# Altium PCB pcb_take2-1.PcbDoc (part 2 of 2)
Units mm, origin at the board's own origin, x right, y up, seen from the top; angles counter-clockwise.
Board outline 120 x 150 mm, 8 copper layers (Top Layer, Power plane, Mid-Layer 1, Mid-Layer 2, Mid-Layer 3, MidLayer4, GND plane, Bottom Layer); 174 components, 191 nets, 1036 pads, 8 vias.
Unrouted connection lines stored in the file: 235.
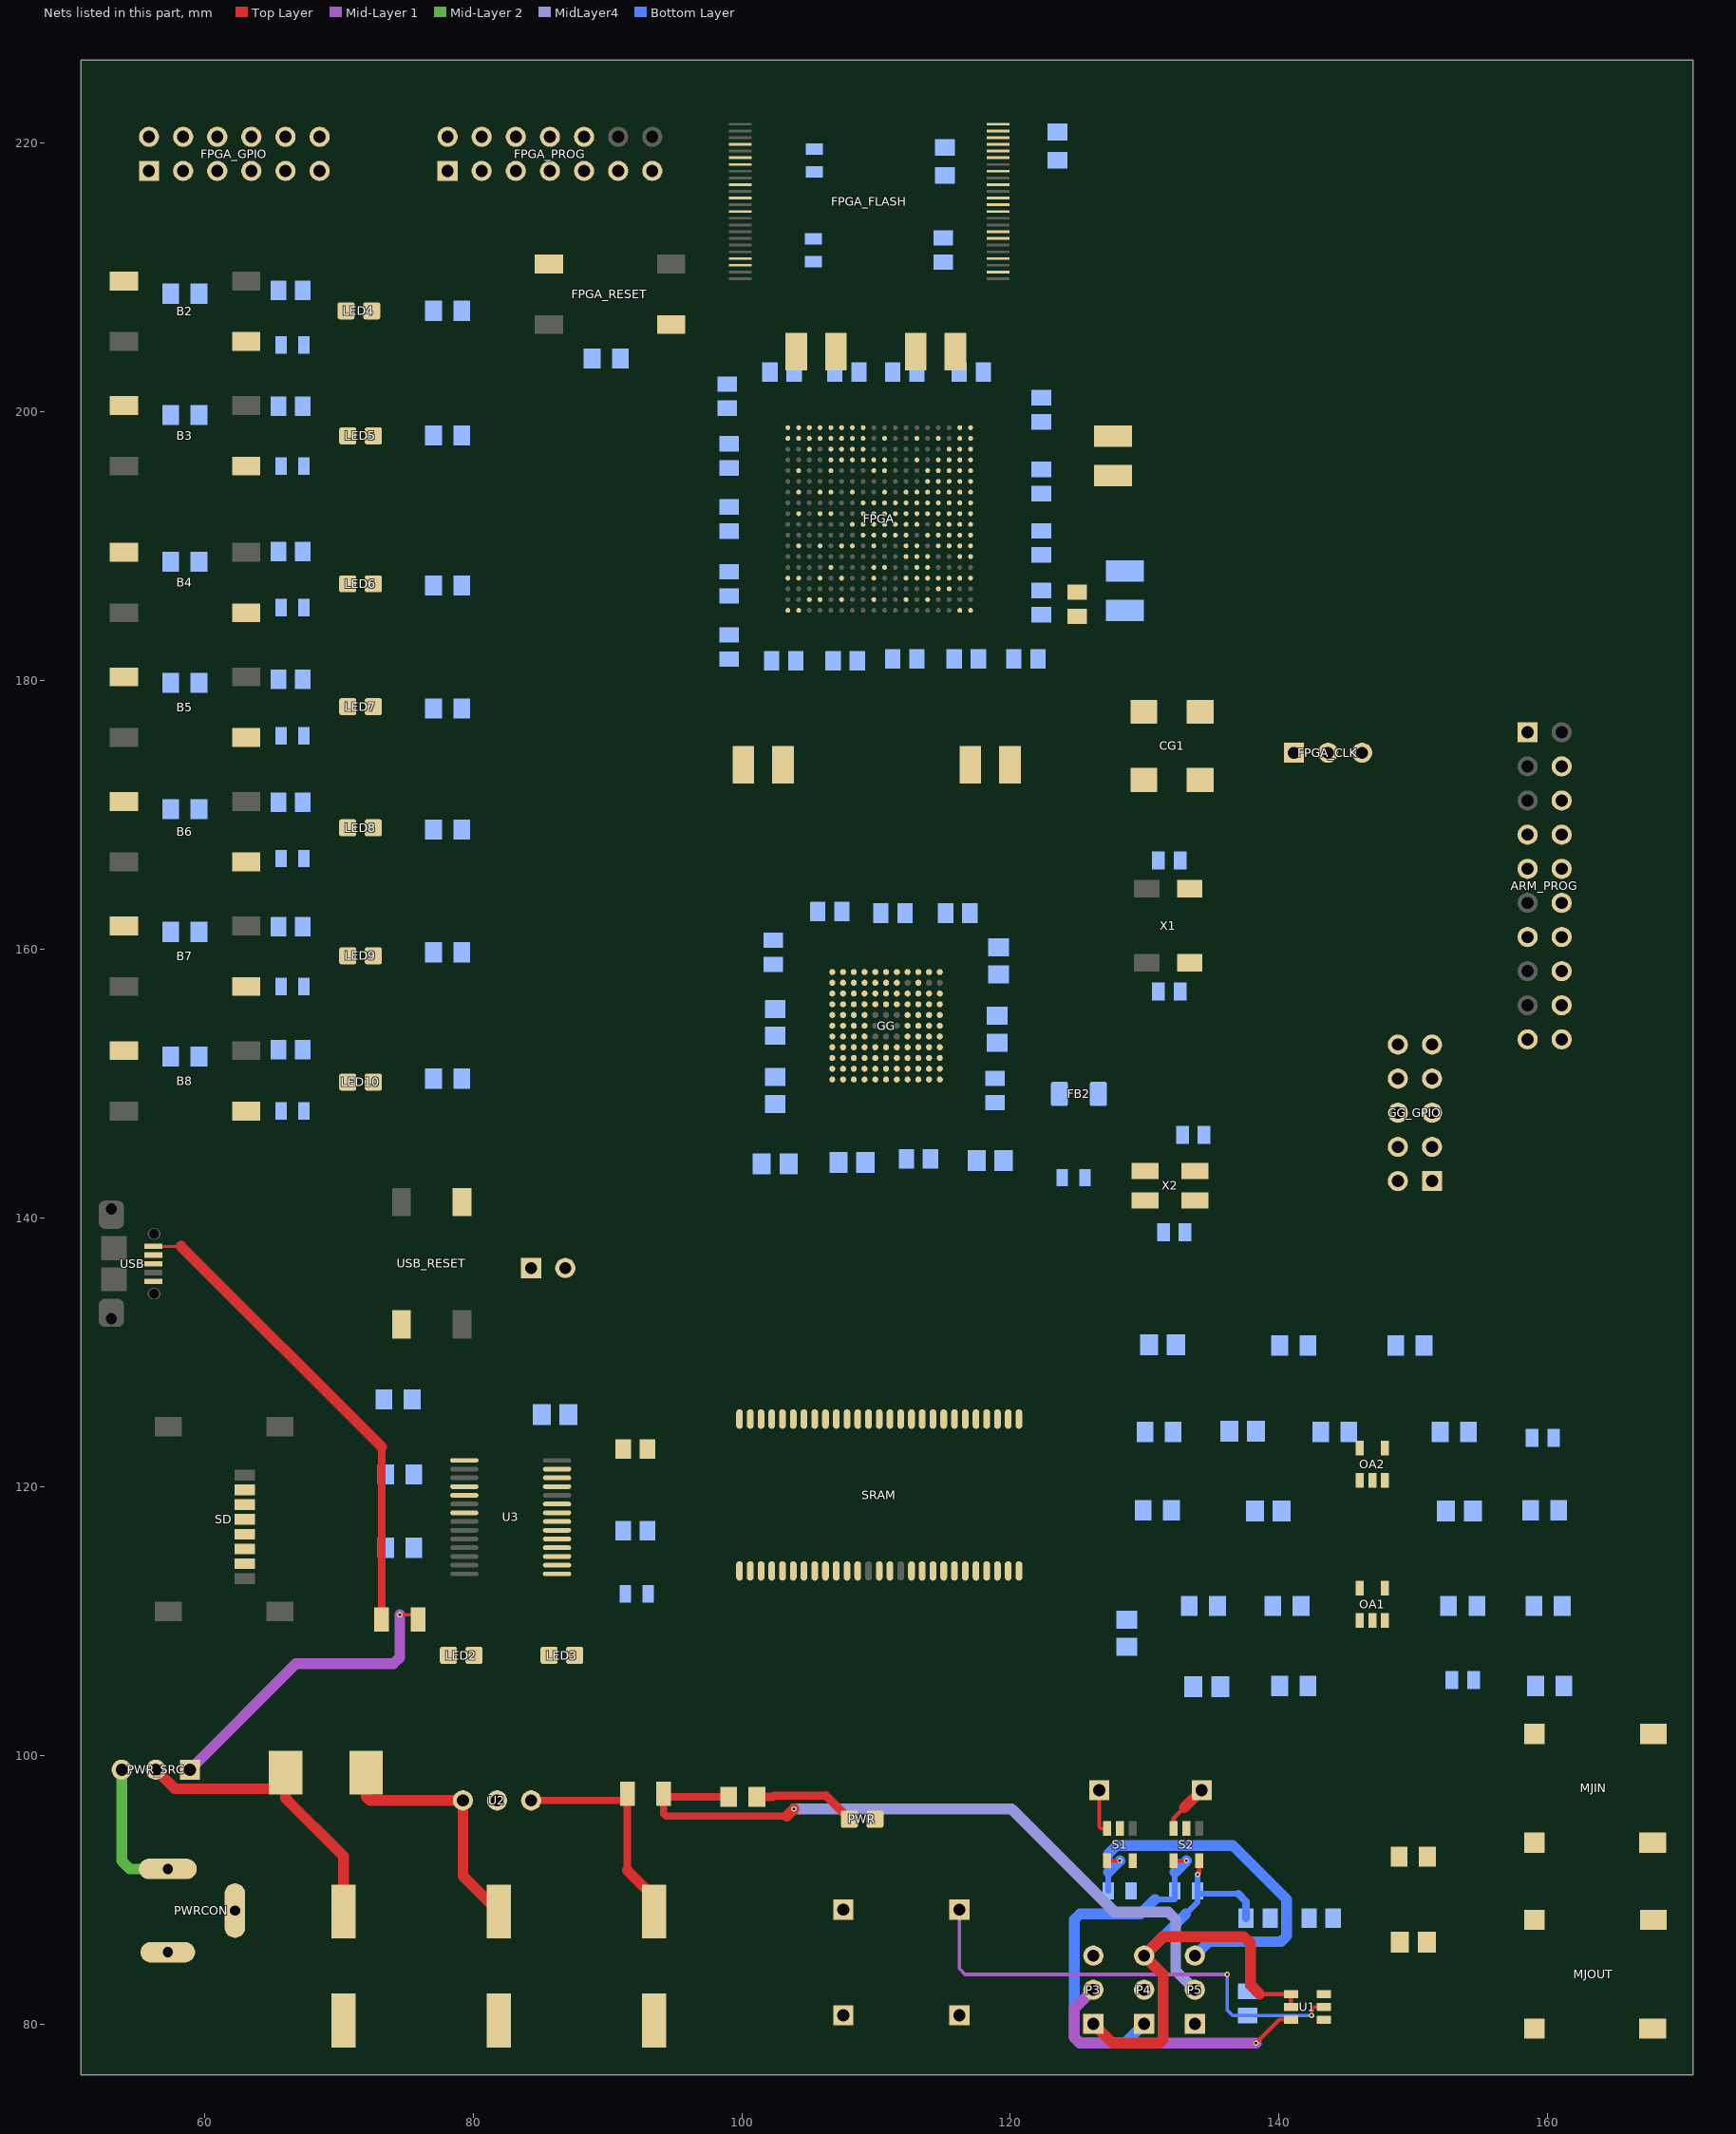
[diagram p7: the nets of this part, all layers, seen from the top]

## Part data
ARM_PROG: "Header, 10-Pin, Dual row"
C1 C43 C44 C45: library part CMP-1036-04747-1, "CAP 1uF 16V ±10% 0805 (2012 Metric) Thickness 1mm SMD"
C2 C6 C10 C14 C19 C23: library part CMP-1038-02303-1, "CAP 100uF 6.3V ±20% 1210 (3225 Metric) Thickness 2.8mm SMD"
C3 C7 C11 C15 C20 C24: library part CMP-1036-04881-1, "CAP 4.7uF 10V ±10% 0805 (2012 Metric) Thickness 1.45mm SMD"
C4 C5 C8 C9 C12 C13 C16 C17 C18 C21 C22 C25 C26: library part CMP-1036-04639-1, "CAP 470nF 16V ±10% 0805 (2012 Metric) Thickness 1mm SMD"
C27 C31: library part CMP-1036-04932-1, "CAP 10uF 25V ±10% 0805 (2012 Metric) Thickness 1.45mm SMD"
C28 C29 C30 C49 C51 C52 C53 C54 C55 C56 C57 C58 C68: library part CMP-1036-03842-1, "CAP 10nF 50V ±10% 0805 (2012 Metric) Thickness 0.75mm SMD"
C32 C33 C34 C35 C36 C37 C38 C50: library part CMP-1036-04420-1, "CAP 100nF 50V ±10% 0805 (2012 Metric) Thickness 1mm SMD"
C39 C40: library part CMP-1036-01219-1, "CAP 22pF 16V ±5% 0805 (2012 Metric) Thickness 0.75mm SMD"
C41 C42: library part CMP-1036-01407-1, "CAP 33pF 16V ±5% 0805 (2012 Metric) Thickness 0.75mm SMD"
C46 C47 C48: "Polarized Capacitor (Axial)"
C59 C64: library part CMP-1036-02142-1, "CAP 150pF 100V ±1% 0805 (2012 Metric) Thickness 0.75mm SMD"
C60 C65: library part CMP-1036-04915-1, "CAP 10uF 6.3V ±10% 0805 (2012 Metric) Thickness 1.45mm SMD"
C61 C67: library part CMP-1036-02797-1, "CAP 680pF 6.3V ±5% 0805 (2012 Metric) Thickness 1mm SMD"
C62 C66: library part CMP-1036-03801-1, "CAP 10nF 6.3V ±5% 0805 (2012 Metric) Thickness 1mm SMD"
C63: library part CMP-1036-04390-1, "CAP 100nF 6.3V ±5% 0805 (2012 Metric) Thickness 1mm SMD"
FB2: library part Inductor, "Inductor"
FPGA: "Spartan-6 LX 1.2V FPGA, 218 User I/Os, 324-Ball Chip-Scale BGA (0.8mm Pitch), Speed Grade 2, Industrial Grade, Pb-Free"
FPGA_CLK P3 P4 P5 PWR_SRC: "Header, 3-Pin"
FPGA_GPIO: "Header, 6-Pin, Dual row"
FPGA_PROG: "Header, 7-Pin, Dual row"
GG: "EFM32 Giant Gecko, M3 ARM Cortex CPU, 1024 KB Flash, 128 KB RAM, 1.85 - 3.8 V Supply, 48 MHz Max Speed, -40 to 85 degC, 112-Pin BGA, RoHS Compliant"
GG_GPIO: "Header, 5-Pin, Dual row"
LED2 LED3: library part LED_SMD_Red_0805, "LED, 0805 SMD, Red"
LED4 LED5 LED6 LED7 LED8 LED9 LED10 PWR: library part LED_SMD_Green_0805, "LED, 0805 SMD, Green"
P_UART: "Header, 2-Pin"
R1: library part CMP-1013-00002-1, "1R 0.125W 5% 0805 (2012 Metric)  SMD"
R2 R4: library part CMP-1013-00026-1, "10R 0.125W 5% 0805 (2012 Metric)  SMD"
R3 R5 R6 R12 R13 R25 R26 R27 R28 R29 R45: library part CMP-1013-00454-1, "330R 0.125W 1% 0805 (2012 Metric)  SMD"
R7 R9 R10 R15 R16 R17 R18 R19 R46 R47: library part CMP-1013-00122-1, "100K 0.125W 5% 0805 (2012 Metric)  SMD"
R8 R11 R14 R20 R21 R22 R23 R24 R48: library part CMP-1013-00050-1, "100R 0.125W 5% 0805 (2012 Metric)  SMD"
R30 R33 R38 R41: library part CMP-1013-00641-1, "15K 0.125W 1% 0805 (2012 Metric)  SMD"
R31 R32 R39 R40: library part CMP-1013-00510-1, "1K 0.125W 1% 0805 (2012 Metric)  SMD"
R34 R42: library part CMP-1013-00670-1, "27K 0.125W 1% 0805 (2012 Metric)  SMD"
R35 R43: library part CMP-1013-00659-1, "22K 0.125W 1% 0805 (2012 Metric)  SMD"
R36 R37: library part CMP-1013-00699-1, "47K 0.125W 1% 0805 (2012 Metric)  SMD"
R44: library part CMP-1013-00586-1, "4K7 0.125W 1% 0805 (2012 Metric)  SMD"
U3: "USB UART Asynchronous Serial Data Transfer Chip, SSOP-28, Tape and Reel"
X1: library part MC-306

## Via types
v1: diameter 0.4, hole 0.2, Top Layer to Bottom Layer, 8 vias

## Nets (pads, with @x,y where several pads share a name; then routed paths per layer and width w, separated by ;. In a path a pad name is that pad's centre, name@x,y a point inside that pad or via, vN(x,y) a via of type N, cw(c..) or ccw(c..) an arc to the next point about the centre after c; other vN are vias at no path point)
ARM_HFXTAL_N: C42.1 GG.L9 X2.3
ARM_HFXTAL_P: C41.1 GG.L8 X2.1
ARM_LFXTAL_N: C40.2 GG.L1 X1.1
ARM_LFXTAL_P: C39.2 GG.K1 X1.2
CTRL_BUS0: FPGA.B8 GG.A8
CTRL_BUS1: FPGA.A8 GG.H1
CTRL_BUS2: FPGA.D9
EBI_A0: FPGA.F15 GG.J4 SRAM.11
EBI_A1: FPGA.F16 GG.K3 SRAM.10
EBI_A2: FPGA.C17 GG.L3 SRAM.9
EBI_A3: FPGA.C18 GG.J7 SRAM.8
EBI_A4: FPGA.F14 GG.J8 SRAM.7
EBI_A5: FPGA.G14 GG.G10 SRAM.48
EBI_A6: FPGA.D17 GG.G11 SRAM.47
EBI_A7: FPGA.D18 GG.E9 SRAM.46
EBI_A8: FPGA.H12 GG.E10 SRAM.45
EBI_A9: FPGA.G13 GG.D11 SRAM.44
EBI_A10: FPGA.E16 GG.C10 SRAM.38
EBI_A11: FPGA.E18 GG.A9 SRAM.37
EBI_A12: FPGA.K12 GG.B9 SRAM.36
EBI_A13: FPGA.K13 GG.C9 SRAM.35
EBI_A14: FPGA.F17 GG.D9 SRAM.34
EBI_A15: FPGA.F18 GG.D10 SRAM.21
EBI_A16: FPGA.H13 GG.E4 SRAM.20
EBI_A17: FPGA.H14 GG.F1 SRAM.19
EBI_A18: FPGA.H15 GG.F2 SRAM.18
EBI_A19: FPGA.H16 GG.F3 SRAM.17
EBI_A20: FPGA.G16 GG.F4
EBI_A21: FPGA.G18 GG.G1
EBI_A22: FPGA.J13 GG.G2
EBI_AD0: GG.B4 SRAM.22
EBI_AD1: GG.A4 SRAM.24
EBI_AD2: GG.C3 SRAM.25
EBI_AD3: GG.B3 SRAM.27
EBI_AD4: GG.A3 SRAM.28
EBI_AD5: GG.B2 SRAM.30
EBI_AD6: GG.A2 SRAM.31
EBI_AD7: GG.A1 SRAM.33
EBI_AD8: GG.B1 SRAM.49
EBI_AD9: GG.C2 SRAM.51
EBI_AD10: GG.C1 SRAM.52
EBI_AD11: GG.D2 SRAM.54
EBI_AD12: GG.D1 SRAM.1
EBI_AD13: GG.E3 SRAM.3
EBI_AD14: GG.E2 SRAM.4
EBI_AD15: GG.E1 SRAM.6
EBI_CS0: FPGA.M13 GG.D6
EBI_CS1: GG.A5 SRAM.16
EBI_D0: FPGA.N18
EBI_D1: FPGA.N17
EBI_D2: FPGA.M18
EBI_D3: FPGA.M16
EBI_D4: FPGA.L18
EBI_D5: FPGA.L17
EBI_D6: FPGA.K18
EBI_D7: FPGA.K17
EBI_D8: FPGA.J18
EBI_D9: FPGA.J16
EBI_D10: FPGA.H18
EBI_D11: FPGA.H17
EBI_D12: FPGA.L16
EBI_D13: FPGA.L15
EBI_D14: FPGA.K16
EBI_D15: FPGA.K15
EBI_REN: FPGA.N14 GG.C6 SRAM.42
EBI_WEN: FPGA.L14 GG.B6 SRAM.15
FPGA_IO2: GG.J1
GND: ARM_PROG.4 ARM_PROG.6 ARM_PROG.8 ARM_PROG.10 ARM_PROG.12 ARM_PROG.14 ARM_PROG.16 ARM_PROG.18 ARM_PROG.20 C1.2 C2.1 C3.1 C4.1 C5.1 C6.1 C7.1 C8.1 C9.1 C10.1 C11.1 C12.1 C13.1 C14.1 C15.1 C16.1 C17.1 C18.1 C19.1 C20.1 C21.1 C22.1 C23.1 C24.1 C25.1 C26.1 C27.1 C28.1 C29.1 C30.1 C31.1 C32.1 C33.1 C34.1 C35.1 C36.1 C37.1 C38.1 C39.1 C40.1 C41.2 C42.2 C43.2 C44.1 C45.2 C46.2 C47.2 C48.2 C49.1 C50.2 C51.1 C52.1 C53.1 C54.1 C55.1 C56.1 C57.1 C58.1 C61.2 C62.2 C63.2 C66.2 C67.2 C68.1 CG1.2 FPGA.A1 FPGA.A18 FPGA.B7 FPGA.B13 FPGA.C3 FPGA.C16 FPGA.D5 FPGA.D10 FPGA.E15 FPGA.G2 FPGA.G5 FPGA.G12 FPGA.G17 FPGA.H8 FPGA.H10 FPGA.J4 FPGA.J9 FPGA.J11 FPGA.J15 FPGA.K8 FPGA.K10 FPGA.L9 FPGA.L11 FPGA.M2 FPGA.M6 FPGA.M17 FPGA.N12 FPGA.N13 FPGA.R1 FPGA.R4 FPGA.R9 FPGA.R14 FPGA.R16 FPGA.R18 FPGA.T16 FPGA.U6 FPGA.U12 FPGA.V1 FPGA.V18 FPGA_CLK.1 FPGA_FLASH.2 FPGA_FLASH.7 FPGA_FLASH.17 FPGA_FLASH.23 FPGA_FLASH.31 FPGA_FLASH.36 FPGA_FLASH.46 FPGA_PROG.1 FPGA_PROG.3 FPGA_PROG.5 FPGA_PROG.7 FPGA_PROG.9 FPGA_PROG.11 FPGA_PROG.13 GG.C7 GG.D4 GG.F9 GG.G3 GG.G9 GG.H6 GG.K4 GG.K7 GG.K10 GG.L7 GND.1 LED4.K LED5.K LED6.K LED7.K LED8.K LED9.K LED10.K MJIN.3 MJOUT.3 OA1.2 OA2.2 P3.3 PWR.K PWRCON.2 PWRCON.3 R8.2 R11.2 R14.2 R20.2 R21.2 R22.2 R23.2 R24.2 R31.1 R37.2 R39.1 R48.2 S1.2 S2.2 SD.6 SRAM.5 SRAM.12 SRAM.26 SRAM.32 SRAM.39 SRAM.41 SRAM.53 U1.6 U2.2 U3.7 U3.18 U3.21 U3.25 U3.26 U3.27 USB.5 X2.2 X2.4
GPIO0: GG.H4 R25.2
GPIO1: GG.H5 R26.2
GPIO2: GG.J5 R27.2
GPIO3: GG.J6 R28.2
GPIO4: GG.K5 R29.2
GPIO5: B4.1 C54.2 GG.D3 R15.1
GPIO6: B5.1 C55.2 GG.C11 R16.1
GPIO7: B6.1 C56.2 GG.L11 R17.1
GPIO8: B7.1 C57.2 GG.K11 R18.1
GPIO9: B8.1 C58.2 GG.J9 R19.1
GPIO10: GG.J10 GG_GPIO.1
GPIO11: GG.H8 GG_GPIO.2
GPIO12: GG.B5 GG_GPIO.3
GPIO13: GG.C5 GG_GPIO.4
GPIO14: GG.C4 GG_GPIO.5
GPIO15: GG.H3 GG_GPIO.6
GPIO16: GG.J3 GG_GPIO.7
GPIO17: GG.F10 GG_GPIO.8
GPIO18: GG.E11 GG_GPIO.9
GPIO19: GG.A7 GG_GPIO.10
GPIO20: GG.A10
GPIO21: GG.A11
GPIO_FPGA0: FPGA.B2 R12.2
GPIO_FPGA1: FPGA.A2 R13.2
GPIO_FPGA2: B2.1 C52.2 FPGA.D6 R9.1
GPIO_FPGA3: B3.1 C53.2 FPGA.C6 R10.1
GPIO_FPGA4: FPGA.B3 FPGA_GPIO.1
GPIO_FPGA5: FPGA.A3 FPGA_GPIO.2
GPIO_FPGA6: FPGA.B4 FPGA_GPIO.3
GPIO_FPGA7: FPGA.A4 FPGA_GPIO.4
GPIO_FPGA8: FPGA.C5 FPGA_GPIO.5
GPIO_FPGA9: FPGA.A5 FPGA_GPIO.6
GPIO_FPGA10: FPGA.B6 FPGA_GPIO.7
GPIO_FPGA11: FPGA.A6 FPGA_GPIO.8
GPIO_FPGA12: FPGA.C7 FPGA_GPIO.9
GPIO_FPGA13: FPGA.A7 FPGA_GPIO.10
GPIO_FPGA14: FPGA.D8 FPGA_GPIO.11
GPIO_FPGA15: FPGA.C8 FPGA_GPIO.12
NetARM_PROG_19: ARM_PROG.19 GG.K6
NetB2_3: B2.3 R11.1
NetB3_3: B3.3 R14.1
NetB4_3: B4.3 R20.1
NetB5_3: B5.3 R21.1
NetB6_3: B6.3 R22.1
NetB7_3: B7.3 R23.1
NetB8_3: B8.3 R24.1
NetC1_1: C1.1 GG.F11
NetC45_1: C45.1 P3.1 P4.3 R2.1 S2.5 U1.1 U1.2 | length 42.6
  Top Layer w0.3: v1(133.946,91.135) 134.046,91.235 S2.5@134.046,92.145 ; 138.547,82.23 U1.1@140.868,82.23 ; U1.2@140.888,81.28 140.868,81.28 U1.1@140.868,82.23 ; U1.1@140.888,82.23 U1.1@140.868,82.23
  Top Layer w0.8: P3.1@126.174,80.01 127.622,78.562 131.089,78.562 131.369,78.842 131.369,83.674 P4.3@129.953,85.09 131.375,86.512 137.363,86.512 137.871,86.004 137.871,82.906 138.547,82.23
  Bottom Layer w0.425: 133.052,88.189 133.946,89.083 R2.1@133.946,89.687 ; v1(133.946,91.135) R2.1@133.946,89.916 R2.1@133.946,89.687 ; 136.957,89.687 R2.1@133.946,89.687
  Bottom Layer w0.575: 136.957,89.687 137.53,89.114 C45.1@137.53,87.884
  Bottom Layer w0.8: P4.3@129.953,85.09 133.052,88.189
NetC46_1: C46.1 L1.1 PWR_SRC.2 | length 22.4
  Top Layer w0.8: PWR_SRC.2@56.388,98.933 57.81,97.511 L1.1@66.04,97.511 ; L1.1@66.04,98.707 L1.1@66.04,97.511 ; C46.1@70.358,88.364 70.358,92.481 66.04,96.799 L1.1@66.04,97.511
NetC47_1: C47.1 L1.2 U2.1 | length 18.5
  Top Layer w0.8: L1.2@72.04,98.707 72.04,96.926 72.319,96.647 U2.1@79.248,96.647 79.248,91.031 C47.1@81.915,88.364
NetC48_1: C48.1 FB1.1 U2.3 | length 16.7
  Top Layer w0.55: U2.3@84.328,96.647 FB1.1@91.487,96.647 ; 91.487,91.444 FB1.1@91.487,96.647 ; FB1.1@91.487,97.126 FB1.1@91.487,96.647
  Top Layer w0.8: 91.487,91.444 93.472,89.459 C48.1@93.472,88.364
NetC50_1: C50.1 U3.17
NetC51_2: C51.2 R7.1 U3.19 USB_RESET.1
NetC59_1: C59.1 OA1.1 R30.1 R35.2
NetC59_2: C59.2 OA1.5 R34.1
NetC60_1: C60.1 R33.2
NetC60_2: C60.2 R31.2 R32.1
NetC61_1: C61.1 R30.2 R33.1 R34.2
NetC62_1: C62.1 GG.H10 R35.1
NetC63_1: C63.1 OA1.3 OA2.3 R36.1 R37.1
NetC64_1: C64.1 OA2.1 R38.1 R43.2
NetC64_2: C64.2 OA2.5 R42.1
NetC65_1: C65.1 R41.2
NetC65_2: C65.2 R39.2 R40.1
NetC66_1: C66.1 GG.H11 R43.1
NetC67_1: C67.1 R38.2 R41.1 R42.2
NetC68_2: C68.2 FPGA.V2 FPGA_RESET.1 R47.1
NetCG1_1: CG1.1 FPGA_CLK.2
NetCG1_3: CG1.3 FPGA.L12
NetFB1_2: FB1.2 P5.2 R3.2 | length 54
  Top Layer w0.55: FB1.2@94.187,97.126 FB1.2@94.187,96.901 ; R3.2@99.026,96.901 FB1.2@94.187,96.901 ; 103.353,95.479 94.365,95.479 94.187,95.656 FB1.2@94.187,96.901
  Top Layer w0.8: 103.353,95.479 v1(103.886,96.012)
  MidLayer4 w0.8: v1(103.886,96.012) 120.091,96.012 127.762,88.341 131.75,88.341 132.309,87.782 132.309,83.972 P5.2@133.731,82.55
NetFB2_1: FB2.1 GG.K8 GG.K9 GG.L10
NetFB2_2: FB2.2 R1.1
NetFB3_1: FB3.1 USB.1 | length 36
  Top Layer w0.2: USB.1@56.211,137.886 58.268,137.886
  Top Layer w0.55: FB3.1@73.199,110.109 73.199,122.955
  Top Layer w0.8: 58.268,137.886 73.199,122.955
NetFPGA_A17: FPGA.A17 FPGA_FLASH.20 FPGA_PROG.6
NetFPGA_B18: FPGA.B18 FPGA_FLASH.21 FPGA_PROG.4
NetFPGA_D15: FPGA.D15 FPGA_PROG.10
NetFPGA_D16: FPGA.D16 FPGA_FLASH.19
NetFPGA_FLASH_22: FPGA_FLASH.22 FPGA_PROG.8
NetFPGA_P13: FPGA.P13 R46.1
NetFPGA_R13: FPGA.R13 FPGA_FLASH.28
NetFPGA_R15: FPGA.R15 FPGA_FLASH.12
NetFPGA_RESET_3: FPGA_RESET.3 R48.1
NetFPGA_U3: FPGA.U3 FPGA_FLASH.11 R44.2
NetFPGA_V17: FPGA.V17 FPGA_FLASH.13 R45.2
NetGG_A6: GG.A6 P_UART.1 U3.1
NetGG_B7: GG.B7 P_UART.2 U3.5
NetGG_H9: GG.H9 S2.3 SNS12.1 | length 3.7
  Top Layer w0.3: S2.3@132.146,94.545 132.146,95.316 132.944,96.114
  Top Layer w0.8: 132.944,96.114 SNS12.1@134.239,97.409
NetGG_J11: GG.J11 S1.3 SNS33.1 | length 3.4
  Top Layer w0.3: SNS33.1@126.619,97.409 126.619,94.691 126.771,94.539 127.193,94.539 S1.3@127.193,94.545
NetGG_L5: GG.L5 MJOUT.2
NetGG_L6: GG.L6 MJOUT.1
NetLED2_K: LED2.K R5.1
NetLED3_K: LED3.K R6.1
NetLED4_A: LED4.A R12.1
NetLED5_A: LED5.A R13.1
NetLED6_A: LED6.A R25.1
NetLED7_A: LED7.A R26.1
NetLED8_A: LED8.A R27.1
NetLED9_A: LED9.A R28.1
NetLED10_A: LED10.A R29.1
NetMJIN_1: MJIN.1 R40.2
NetMJIN_2: MJIN.2 R32.2
NetP3_2: P3.2 U1.3 | length 21.2
  Top Layer w0.3: v1(138.288,78.588) 140.03,80.33 U1.3@140.888,80.33
  Mid-Layer 1 w0.8: P3.2@126.174,82.55 124.765,81.14 124.765,78.994 125.171,78.588 v1(138.288,78.588)
NetP4_1: P4.1 R2.2 S2.4 | length 27
  Top Layer w0.3: S2.4@132.146,92.145 132.146,92.151 v1(133.096,92.151)
  Bottom Layer w0.425: 130.759,89.281 132.246,89.281 R2.2@132.246,89.916 132.246,91.301
  Bottom Layer w0.8: P4.1@129.953,80.01 128.53,78.588 125.171,78.588 124.765,78.994 124.765,87.782 125.171,88.189 129.667,88.189 130.759,89.281 ; 132.246,91.301 v1(133.096,92.151)
NetP5_3: P5.3 R4.1 S1.4 | length 30.3
  Top Layer w0.3: S1.4@127.193,92.145 127.193,92.151 v1(128.143,92.151)
  Bottom Layer w0.425: R4.1@127.293,89.916 127.293,91.301 127.293,92.659
  Bottom Layer w0.8: 127.293,91.301 v1(128.143,92.151) ; 127.293,92.659 127.928,93.294 136.55,93.294 140.564,89.281 140.564,86.563 140.132,86.131 134.772,86.131 P5.3@133.731,85.09
NetPWR_A: PWR.A R3.1 | length 7.7
  Top Layer w0.625: R3.1@101.126,96.901 102.286,96.901 102.387,97.003 106.261,97.003
  Top Layer w0.635: 106.261,97.003 PWR.A@108.013,95.25
NetPWR_SRC_3: PWR_SRC.3 PWRCON.1 | length 10.5
  Mid-Layer 2 w0.8: PWR_SRC.3@53.848,98.933 53.848,92.154 54.458,91.544 PWRCON.1@57.277,91.544
NetR5_2: R5.2 U3.22
NetR6_2: R6.2 U3.23
NetR8_1: R8.1 USB_RESET.3
NetU3_15: U3.15 USB.3
NetU3_16: U3.16 USB.2
SWCLK: ARM_PROG.9 GG.E8
SWDIO: ARM_PROG.7 GG.D8
SWO: ARM_PROG.13 GG.C8
US2_CLK: GG.K2 SD.5
US2_CS: GG.L2 SD.2
US2_RX: GG.J2 SD.7
US2_TX: GG.H2 SD.3
VCC12: C43.1 FPGA.G7 FPGA.H9 FPGA.H11 FPGA.J8 FPGA.J10 FPGA.K9 FPGA.K11 FPGA.L8 FPGA.L10 FPGA.M7 FPGA.M12 PWR12.1 U1.4
VCC18: C44.2 FPGA_FLASH.4 FPGA_FLASH.15 FPGA_FLASH.34 PWR18.1 U1.5 | length 35
  Top Layer w0.254: v1(142.418,80.645) 142.418,81.077 142.621,81.28 U1.5@143.338,81.28
  Mid-Layer 1 w0.254: PWR18.1@116.205,88.519 116.205,84.125 116.637,83.693 v1(136.144,83.693)
  Bottom Layer w0.254: v1(136.144,83.693) 136.144,81.04 136.55,80.634 C44.2@137.668,80.634 142.407,80.634 v1(142.418,80.645)
VCC33: ARM_PROG.1 C2.2 C3.2 C4.2 C5.2 C6.2 C7.2 C8.2 C9.2 C10.2 C11.2 C12.2 C13.2 C14.2 C15.2 C16.2 C17.2 C18.2 C19.2 C20.2 C21.2 C22.2 C23.2 C24.2 C25.2 C26.2 C27.2 C28.2 C29.2 C30.2 C31.2 C32.2 C33.2 C34.2 C35.2 C36.2 C37.2 C38.2 CG1.4 FPGA.B1 FPGA.B5 FPGA.B10 FPGA.B15 FPGA.B17 FPGA.D7 FPGA.D13 FPGA.E2 FPGA.E5 FPGA.E9 FPGA.E10 FPGA.E14 FPGA.E17 FPGA.G4 FPGA.G10 FPGA.G15 FPGA.J2 FPGA.J5 FPGA.J12 FPGA.J14 FPGA.J17 FPGA.K7 FPGA.M4 FPGA.M9 FPGA.M15 FPGA.P5 FPGA.P9 FPGA.P10 FPGA.P14 FPGA.R2 FPGA.R6 FPGA.R12 FPGA.R17 FPGA.T15 FPGA.U4 FPGA.U9 FPGA.U14 FPGA_CLK.3 FPGA_FLASH.8 FPGA_FLASH.24 FPGA_FLASH.30 FPGA_FLASH.38 FPGA_FLASH.45 GG.D5 GG.D7 GG.F8 GG.G4 GG.G8 GG.H7 GG.L4 LED2.A LED3.A OA1.4 OA2.4 P4.2 P5.1 PWR33.1 R1.2 R4.2 R7.2 R9.2 R10.2 R15.2 R16.2 R17.2 R18.2 R19.2 R36.2 R44.1 R45.1 R46.2 R47.2 S1.5 SD.4 SRAM.2 SRAM.13 SRAM.14 SRAM.23 SRAM.29 SRAM.50 U3.4
VCC33V: FPGA_PROG.2
VCC_USB_SUPPLY: C49.2 FB3.2 PWR_SRC.1 U3.20 | length 23.6
  Top Layer w0.254: v1(74.549,110.465) FB3.2@75.899,110.465
  Mid-Layer 1 w0.8: PWR_SRC.1@58.928,98.933 66.827,106.832 74.092,106.832 74.549,107.29 v1(74.549,110.465)
pads on no net: ARM_PROG.2 ARM_PROG.3 ARM_PROG.5 ARM_PROG.11 ARM_PROG.15 ARM_PROG.17 B2.2 B2.4 B3.2 B3.4 B4.2 B4.4 B5.2 B5.4 B6.2 B6.4 B7.2 B7.4 B8.2 B8.4 FB2.0 FPGA.A9 FPGA.A10 FPGA.A11 FPGA.A12 FPGA.A13 FPGA.A14 FPGA.A15 FPGA.A16 FPGA.B9 FPGA.B11 FPGA.B12 FPGA.B14 FPGA.B16 FPGA.C1 FPGA.C2 FPGA.C4 FPGA.C9 FPGA.C10 FPGA.C11 FPGA.C12 FPGA.C13 FPGA.C14 FPGA.C15 FPGA.D1 FPGA.D2 FPGA.D3 FPGA.D4 FPGA.D11 FPGA.D12 FPGA.D14 FPGA.E1 FPGA.E3 FPGA.E4 FPGA.E6 FPGA.E7 FPGA.E8 FPGA.E11 FPGA.E12 FPGA.E13 FPGA.F1 FPGA.F2 FPGA.F3 FPGA.F4 FPGA.F5 FPGA.F6 FPGA.F7 FPGA.F8 FPGA.F9 FPGA.F10 FPGA.F11 FPGA.F12 FPGA.F13 FPGA.G1 FPGA.G3 FPGA.G6 FPGA.G8 FPGA.G9 FPGA.G11 FPGA.H1 FPGA.H2 FPGA.H3 FPGA.H4 FPGA.H5 FPGA.H6 FPGA.H7 FPGA.J1 FPGA.J3 FPGA.J6 FPGA.J7 FPGA.K1 FPGA.K2 FPGA.K3 FPGA.K4 FPGA.K5 FPGA.K6 FPGA.K14 FPGA.L1 FPGA.L2 FPGA.L3 FPGA.L4 FPGA.L5 FPGA.L6 FPGA.L7 FPGA.L13 FPGA.M1 FPGA.M3 FPGA.M5 FPGA.M8 FPGA.M10 FPGA.M11 FPGA.M14 FPGA.N1 FPGA.N2 FPGA.N3 FPGA.N4 FPGA.N5 FPGA.N6 FPGA.N7 FPGA.N8 FPGA.N9 FPGA.N10 FPGA.N11 FPGA.N15 FPGA.N16 FPGA.P1 FPGA.P2 FPGA.P3 FPGA.P4 FPGA.P6 FPGA.P7 FPGA.P8 FPGA.P11 FPGA.P12 FPGA.P15 FPGA.P16 FPGA.P17 FPGA.P18 FPGA.R3 FPGA.R5 FPGA.R7 FPGA.R8 FPGA.R10 FPGA.R11 FPGA.T1 FPGA.T2 FPGA.T3 FPGA.T4 FPGA.T5 FPGA.T6 FPGA.T7 FPGA.T8 FPGA.T9 FPGA.T10 FPGA.T11 FPGA.T12 FPGA.T13 FPGA.T14 FPGA.T17 FPGA.T18 FPGA.U1 FPGA.U2 FPGA.U5 FPGA.U7 FPGA.U8 FPGA.U10 FPGA.U11 FPGA.U13 FPGA.U15 FPGA.U16 FPGA.U17 FPGA.U18 FPGA.V3 FPGA.V4 FPGA.V5 FPGA.V6 FPGA.V7 FPGA.V8 FPGA.V9 FPGA.V10 FPGA.V11 FPGA.V12 FPGA.V13 FPGA.V14 FPGA.V15 FPGA.V16 FPGA_FLASH.1 FPGA_FLASH.3 FPGA_FLASH.5 FPGA_FLASH.6 FPGA_FLASH.9 FPGA_FLASH.10 FPGA_FLASH.14 FPGA_FLASH.16 FPGA_FLASH.18 FPGA_FLASH.25 FPGA_FLASH.26 FPGA_FLASH.27 FPGA_FLASH.29 FPGA_FLASH.32 FPGA_FLASH.33 FPGA_FLASH.35 FPGA_FLASH.37 FPGA_FLASH.39 FPGA_FLASH.40 FPGA_FLASH.41 FPGA_FLASH.42 FPGA_FLASH.43 FPGA_FLASH.44 FPGA_FLASH.47 FPGA_FLASH.48 FPGA_PROG.12 FPGA_PROG.14 FPGA_RESET.2 FPGA_RESET.4 GG.B8 GG.B10 GG.B11 GG.E5 GG.E6 GG.E7 GG.F5 GG.F6 GG.F7 GG.G5 GG.G6 GG.G7 LED2.0 LED3.0 LED4.0 LED5.0 LED6.0 LED7.0 LED8.0 LED9.0 LED10.0 PWR.0 S1.1 S2.1 SD. SD.1 SD.8 SRAM.40 SRAM.43 U3.2 U3.3 U3.6 U3.8 U3.9 U3.10 U3.11 U3.12 U3.13 U3.14 U3.24 U3.28 USB. USB.4 USB_RESET.2 USB_RESET.4 X1.3 X1.4

## Polygon pours and split planes (outlines as drawn)
VCC18 on Power plane (split plane): 139.271,208.666 139.271,113.149 119.418,93.297 119.39,93.255 119.381,93.205 119.381,86.769 119.371,86.759 113.555,86.759 113.555,94.021 135.737,116.203 135.765,116.245 135.774,116.295 135.774,196.115 135.765,196.165 135.737,196.207 123.242,208.702 123.2,208.73 123.15,208.739 99.164,208.739 98.379,209.524 98.379,222.216 98.479,222.316 125.621,222.316
VCC12 on Power plane (split plane): 112.52,189.74 100.965,189.74 100.915,189.731 100.873,189.703 83.982,172.812 83.954,172.77 83.945,172.72 83.945,108.458 83.954,108.408 83.982,108.366 107.35,84.998 108.62,83.728 109.114,83.235 109.114,82.899 109.114,82.121 109.114,81.732 109.114,78.996 104.267,78.996 104.267,81.79 104.258,81.84 104.229,81.882 76.075,110.036 76.075,172.031 98.352,194.308 112.52,194.308
VCC33 on Power plane (split plane): 170.29,76.71 51.31,76.71 51.31,225.69 170.29,225.69
GND on GND plane (split plane): 170.29,76.71 51.31,76.71 51.31,225.69 170.29,225.69

## Keep-outs
Keep-Out Layer:
  lines w0.3: 51.181,76.581 170.307,76.581 170.307,225.806 51.181,225.806 51.181,76.581

## Other copper
Power plane (plane layer: these items are gaps in the copper):
  lines w0.254: 109.244,78.867 107.442,78.867 104.138,78.867 104.138,81.79 75.946,109.982 75.946,172.085 98.298,194.437 101.473,194.437 112.522,194.437 112.649,194.564 112.649,189.738 112.776,189.611 100.965,189.611 84.074,172.72 84.074,108.458 107.442,85.09 108.712,83.82 109.244,83.288 109.244,82.899 109.244,82.121 109.244,81.732 109.244,78.891 ; 98.25,209.47 99.11,208.61 123.15,208.61 135.645,196.115 135.645,116.295 113.425,94.075 113.425,86.63 119.425,86.63 119.51,86.715 119.51,93.205 139.4,113.095 139.4,208.72 125.675,222.445 98.425,222.445 98.25,222.27 98.25,209.47

## Silkscreen, mask and mechanical layers (free items; w line width, h text height)
Top Overlay:
  drawing of 18340 lines, arcs and shapes, not listed
  text "Bitless" at 134.493,218.3 h10.52
  text "Kristian Klomsten Skordal" at 134.493,213.868 h3.8
  text "FPGA IO" at 81.407,212.979 h1.52 r270
  text "Jakob Dagsland Knutsen" at 135.999,210.694 h3.8
  text "Hanna Holler Kamperud" at 136.357,207.503 h3.8
  text "Håvard Wormdal Høiby" at 137.706,204.298 h3.7
  text "Runar Bergheim Olsen" at 138.424,201.121 h3.8
  text "Magnus Halvorsen" at 143.237,197.93 h3.8
  text "Olav Emil Eiksund" at 144.326,194.468 h3.8
  text "Christian Chavez" at 145.636,191.277 h3.8
  text "GG IO" at 83.693,190.373 h1.52 r270
  text "Sondre Lefsaker" at 146.152,188.086 h3.8
  text "Terje Runde" at 151.13,185.039 h3.8
  text "FPGA" at 86.995,171.577 h1.52
  text "GG" at 86.995,167.894 h1.52
  text "IO" at 92.837,142.367 h1.52 r270
  text "AUDIO" at 146.685,135.128 h1.52
  text "POWER SUPPLY" at 95.25,103.124 h1.52

## Text inside footprints (layer, text, board x,y; h text height)
ARM_PROG: Top Overlay "2" at 160.528,178.816 h1.27 r270; Top Overlay "1" at 157.988,178.816 h1.27 r270; Top Overlay "19" at 157.988,151.511 h1.27 r270; Top Overlay "20" at 160.528,151.511 h1.27 r270
FPGA_GPIO: Top Overlay "2" at 53.213,219.964 h1.27; Top Overlay "1" at 53.34,217.424 h1.27; Top Overlay "1" at 70.612,217.424 h1.27; Top Overlay "1" at 71.628,217.424 h1.27; Top Overlay "12" at 70.612,219.964 h1.27
FPGA_PROG: Top Overlay "13" at 95.377,217.424 h1.27; Top Overlay "14" at 95.377,219.964 h1.27; Top Overlay "1" at 75.057,217.424 h1.27; Top Overlay "2" at 75.057,219.964 h1.27
GG_GPIO: Top Overlay "2" at 149.352,140.081 h1.27 r90; Top Overlay "1" at 151.892,140.589 h1.27 r90; Top Overlay "9" at 151.892,154.686 h1.27 r90; Top Overlay "10" at 149.352,154.686 h1.27 r90